# Altium PCB Printer-Pi-Pro_Altium_PCB.pcbdoc
Units mil, origin at the board's own origin, x right, y up, seen from the top; angles counter-clockwise.
Board outline 3337.5 x 1820 mil, 2 copper layers (Top Layer, Bottom Layer); 14 components, 16 nets, 72 pads, 12 vias.
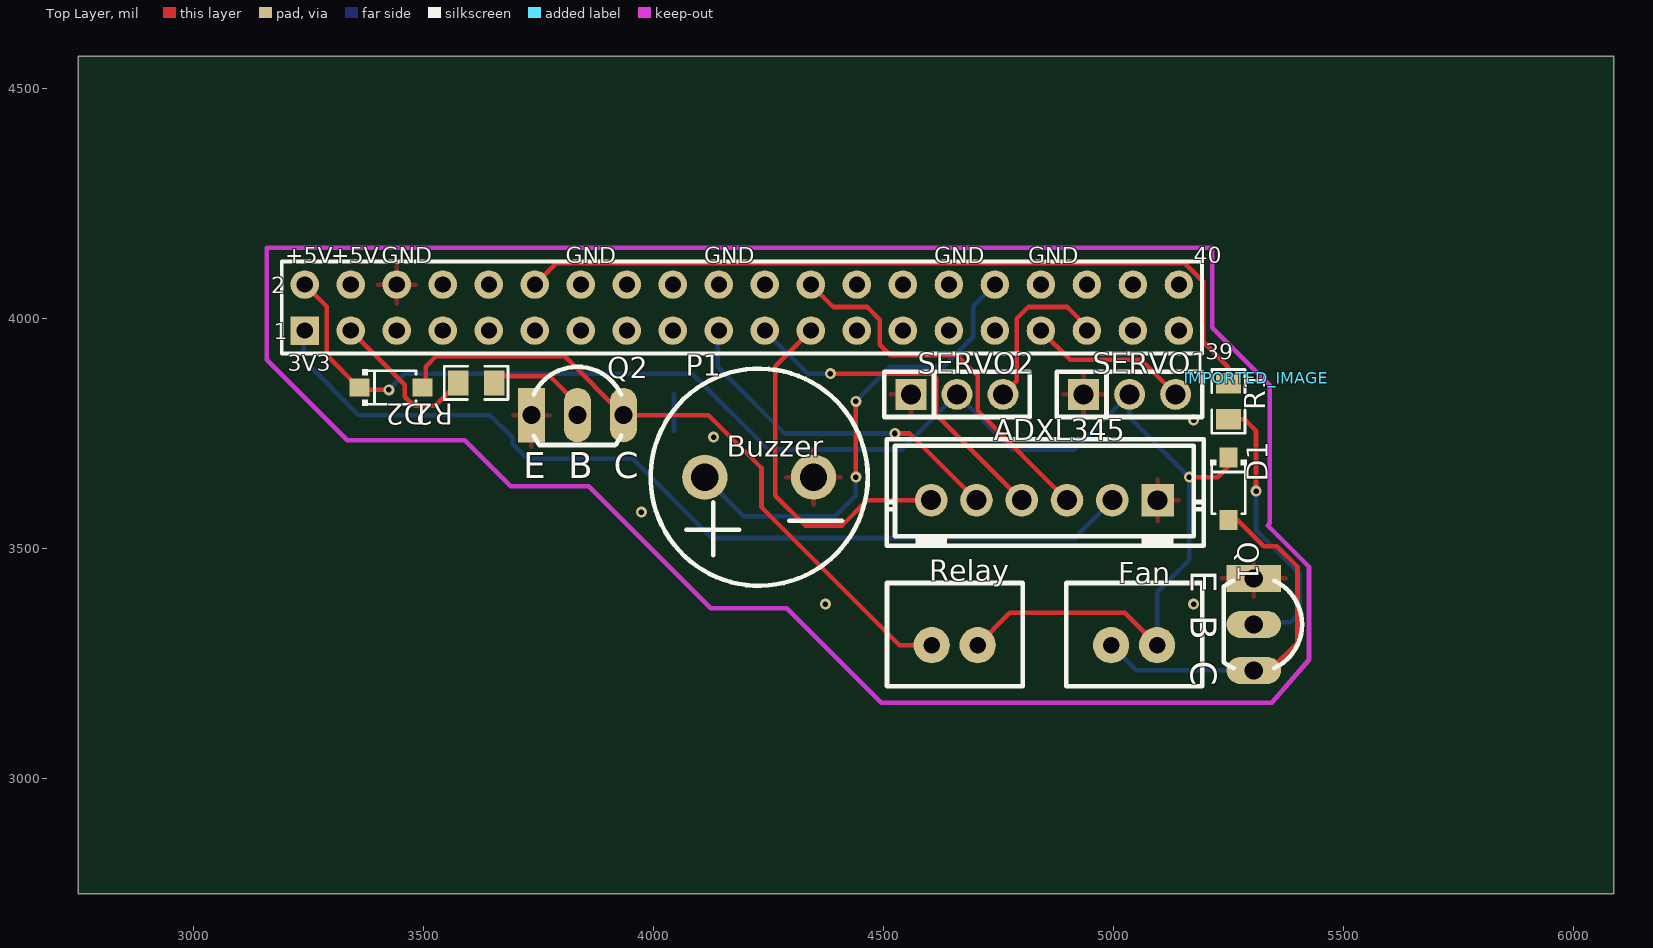
[diagram p0: Top Layer view]
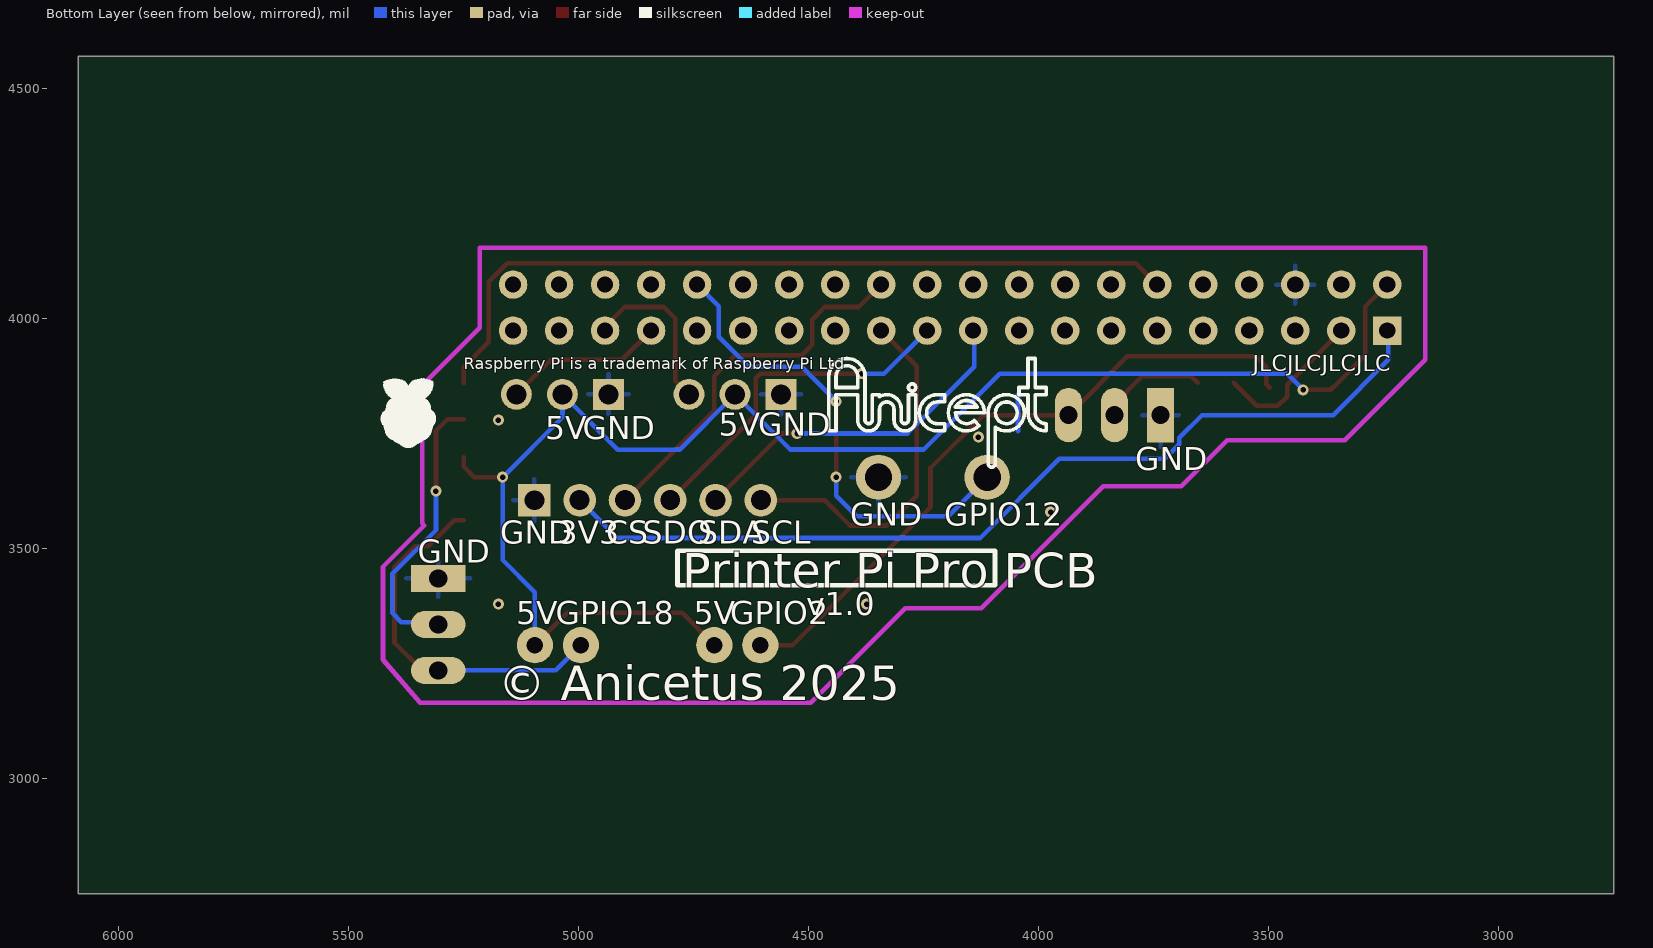
[diagram p1: Bottom Layer view, seen from below]

## Layer stack, top to bottom
Top Layer: signal copper (thickness not stored)
Dielectric: dielectric 12.6, FR-4, Dk 4.8
Bottom Layer: signal copper (thickness not stored)

## Board outline
6087.5,2750 2750,2750 2750,4570 6087.5,4570

## Design rules (kind name [scope] priority, off if disabled: settings)
BoardOutlineClearance copperThickness1oz [All] p0: genericclearance=10 ignorepadtopadclearanceinfootprint=FALSE except(0: Arc-SplitContinuation Track-SplitContinuation SMDPad-SplitContinuation THPad-SplitContinuation Via-SplitContinuation Fill-SplitContinuation Poly-SplitContinuation Region-SplitContinuation Text-SplitContinuation; 6: Track-CutoutEdge SMDPad-CutoutEdge THPad-CutoutEdge Via-CutoutEdge Region-CutoutEdge; 11.8: Track-OutlineEdge SMDPad-OutlineEdge THPad-OutlineEdge Via-OutlineEdge Fill-OutlineEdge Region-OutlineEdge Poly-OutlineEdge Text-OutlineEdge Fill-CutoutEdge)
BoardOutlineClearance copperThickness2oz [All] p0: genericclearance=10 ignorepadtopadclearanceinfootprint=FALSE except(0: Arc-SplitContinuation Track-SplitContinuation SMDPad-SplitContinuation THPad-SplitContinuation Via-SplitContinuation Fill-SplitContinuation Poly-SplitContinuation Region-SplitContinuation Text-SplitContinuation; 6: Track-CutoutEdge SMDPad-CutoutEdge THPad-CutoutEdge Via-CutoutEdge Region-CutoutEdge; 11.8: Track-OutlineEdge SMDPad-OutlineEdge THPad-OutlineEdge Via-OutlineEdge Fill-OutlineEdge Region-OutlineEdge Poly-OutlineEdge Text-OutlineEdge Fill-CutoutEdge)
Clearance copperThickness1oz [(InNet('GND') OR InNet('3V3') OR InNet('$1N1246') OR InNet('$1N1254') OR InNet('$1N1262') OR InNet('$1N1269') OR InNet('BUZZER') OR InNet('$1N1476') OR InNet('+5V') OR InNet('$1N1482') OR InNet('$1N673') OR InNet('$1N1043') OR InNet('RELAY_GPIO') OR InNet('FAN_PWM') OR InNet('$1N779') OR InNet('$1N1048'))] p1: gap=7 ignorepadtopadclearanceinfootprint=FALSE except(4: Track-Track; 6: Track-SMDPad SMDPad-SMDPad Track-THPad SMDPad-THPad THPad-THPad Track-Via SMDPad-Via THPad-Via Via-Via SMDPad-Fill THPad-Fill Via-Fill Fill-Fill Track-Region SMDPad-Region THPad-Region Via-Region Region-Region Track-Poly SMDPad-Poly THPad-Poly Via-Poly Fill-Poly Region-Poly Poly-Poly Track-Text SMDPad-Text THPad-Text Via-Text Fill-Text Region-Text Poly-Text Text-Text; 6.9: Track-Hole SMDPad-Hole THPad-Hole Via-Hole Fill-Hole Region-Hole Poly-Hole Text-Hole Sheet-Hole; 11.8: Track-Fill Fill-Region Track-Sheet SMDPad-Sheet THPad-Sheet Via-Sheet Fill-Sheet Region-Sheet Poly-Sheet Text-Sheet)
Clearance copperThickness2oz [All] p1: gap=7 ignorepadtopadclearanceinfootprint=FALSE except(6: Track-SMDPad SMDPad-SMDPad Track-THPad SMDPad-THPad THPad-THPad Track-Via SMDPad-Via THPad-Via Via-Via SMDPad-Fill THPad-Fill Via-Fill Fill-Fill Track-Region SMDPad-Region THPad-Region Via-Region Region-Region Track-Poly SMDPad-Poly THPad-Poly Via-Poly Fill-Poly Region-Poly Poly-Poly Track-Text SMDPad-Text THPad-Text Via-Text Fill-Text Region-Text Poly-Text Text-Text; 6.9: Track-Hole SMDPad-Hole THPad-Hole Via-Hole Fill-Hole Region-Hole Poly-Hole Text-Hole Sheet-Hole; 8: Track-Track; 11.8: Track-Fill Fill-Region Track-Sheet SMDPad-Sheet THPad-Sheet Via-Sheet Fill-Sheet Region-Sheet Poly-Sheet Text-Sheet)
DiffPairsRouting differentialPair [All] p1: maxuncoupledlength=10 minlimit=6 maxlimit=6 mostfreqgap=6 toplayer_minwidth=5 toplayer_prefwidth=10 toplayer_maxwidth=100 bottomlayer_minwidth=5 bottomlayer_prefwidth=10 bottomlayer_maxwidth=100
PasteMaskExpansion pasteMaskExpansion [All] p1: expansion=0
PlaneConnect innerPlane [All] p1: planeconnectstyle=Relief reliefexpansion=20 reliefentries=4 reliefconductorwidth=10 reliefairgap=10
PolygonConnect copperRegion [All] p1: connectstyle=Relief reliefentries=4 reliefconductorwidth=10 polygonreliefangle="90 Angle" airgapwidth=10
RoutingVias viaSize [All] p1: viastyle="Through Hole" holewidth=12.0078 minholewidth=11.811 maxholewidth=248.0314 width=24.0158 minwidth=19.685 maxwidth=393.7008
SolderMaskExpansion solderMaskExpansion [All] p1: useseparateexpansions=TRUE expansion=2 expansionbottom=2
Width copperThickness1oz [All] p1: maxlimit=100 minlimit=5 preferedwidth=10
Width copperThickness2oz [All] p1: maxlimit=100 minlimit=8 preferedwidth=10

## Components (designator, comment, footprint, x,y, rotation, side; value= is the part's Value field where it differs from the comment)
ADXL345 "B6B-XH-A-GU" CONN-TH_6P-P2.50_C9900020524 4850,3605 r0 top
Buzzer "YS-MBZ12085C05R42" BUZ-TH_BD12.0-P6.00-D0.9-RD 4230,3655 r180 top
D1 "1N4148W_C81598" SOD-123F_L2.7-W1.6-LS3.8-RD 5250,3630 r270 top
D2 "1N4148W_C81598" SOD-123F_L2.7-W1.6-LS3.8-RD 3430,3850 r0 top
Fan "B2B-XH-A(LF)(SN)" "JST-XH 2p" 4995,3290 r0 top
IMPORTED_IMAGE "IMPORTED_IMAGE" IMPORTED_IMAGE 5310,3870 r0 top
P1 "2.54-2*20" HDR-20X2/2.54 4142.39,4073.71 r0 top
Q1 "2N2222A_C5330385" 2N2222A 5305,3335 r270 top
Q2 "2N2222A_C5330385" 2N2222A 3835,3790 r0 top
R1 "ARG05FTC5000" R0805 5250,3820 r90 top
R2 "ARG05FTC5000" R0805 3615,3860 r180 top
Relay "B2B-XH-A(LF)(SN)" "JST-XH 2p" 4605,3290 r0 top
SERVO1 "PZ254V-11-03P" HDR-TH_203S-Y-1X03PG 5035,3835 r0 top
SERVO2 "PZ254V-11-03P" HDR-TH_203S-Y-1X03PG 4660,3835 r0 top

## Footprints (in the part's own frame and the unit in brackets; to place one, negate y for a bottom-side part, rotate by r counter-clockwise, add the part's x,y. Pads: shape width x height; smd on the part's side, far side on the other; paste and mask are expansions set on the pad)
2N2222A [mm]
  rect 1.5x3 hole 1: 1(-2.54,0)
  oval 1.5x3 hole 1: 2(0,0.001) 3(2.54,0.001)
  silkscreen extent -2.41,-1.65 2.42,2.67
BUZ-TH_BD12.0-P6.00-D0.9-RD [mm]
  round 2.5 hole 1.5: 1(-3,0) 2(3,0)
  silkscreen extent -5.99,-5.99 5.99,5.99
CONN-TH_6P-P2.50_C9900020524 [mm]
  rect 1.8x1.8 hole 1.1: 1(6.251,-0.001)
  round 1.8 hole 1.1: 2(3.749,0.001) 3(1.249,0.001) 4(-1.251,0.001) 5(-3.751,0.001) 6(-6.251,0.001)
  silkscreen extent -8.7,-2.52 8.79,3.37
HDR-20X2/2.54 [mil]
  rect 62x62 hole 35: 1(-900,-100)
  round 62 hole 35: 2(-900,0) 3(-800,-100) 4(-800,0) 5(-700,-100) 6(-700,0) 7(-600,-100) 8(-600,0) 9(-500,-100) 10(-500,0) 11(-400,-100) 12(-400,0) 13(-300,-100) 14(-300,0) 15(-200,-100) 16(-200,0) 17(-100,-100) 18(-100,0) 19(0,-100) 20(0,0) 21(100,-100) 22(100,0) 23(200,-100) 24(200,0) 25(300,-100) 26(300,0) 27(400,-100) 28(400,0) 29(500,-100) 30(500,0) 31(600,-100) 32(600,0) 33(700,-100) 34(700,0) 35(800,-100) 36(800,0) 37(900,-100) 38(900,0) 39(1000,-100) 40(1000,0)
  silkscreen extent -950,-150 1050,50
HDR-TH_203S-Y-1X03PG [mm]
  rect 1.7x1.7 hole 1.1: 1(-2.54,0)
  round 1.7 hole 1.1: 2(0,0) 3(2.54,0)
  silkscreen extent -4.01,-1.25 4.01,1.25
IMPORTED_IMAGE [mil]
"JST-XH 2p" [mm]
  round 2 hole 0.914: 1(0,0) 2(2.54,0)
  silkscreen extent -2.47,-2.27 5.03,3.43
R0805 [mm]
  rect 1.133x1.377 smd: 1(-1,0) 2(1,0)
  silkscreen extent -1.76,-0.92 1.76,0.92
SOD-123F_L2.7-W1.6-LS3.8-RD [mm]
  rect 1.1x1 smd: 1(-1.735,0) 2(1.735,0)
  silkscreen extent -1.6,-1 1.38,1

## Via types
v1: diameter 24.02, hole 12.01, Top Layer to Bottom Layer, 12 vias

## Nets (pads, with @x,y where several pads share a name; then routed paths per layer and width w, separated by ;. In a path a pad name is that pad's centre, name@x,y a point inside that pad or via, vN(x,y) a via of type N, cw(c..) or ccw(c..) an arc to the next point about the centre after c; other vN are vias at no path point)
3V3: ADXL345.2 P1.1 | length 2026.3
  Bottom Layer w10: P1.1 3240,3971.32 3240,3910 3360,3790 3645,3790 3694.49,3740.51 3694.49,3726.39 3725.87,3695 3955,3695 4127.07,3522.93 4917.93,3522.93 4925,3530 4925,3532.44 ADXL345.2
$1N673: D1.2 Fan.1 Q1.3 | length 809.8
  Top Layer w10: D1.2 5270,3561.7 5326.69,3505 5355,3505 5400,3460 5400,3295 5340,3235 Q1.3
  Bottom Layer w10: Fan.1 5050,3235 Q1.3
$1N779: Q1.2 R1.1 | length 615.7
  Top Layer w10: R1.1 5285,3780.63 5310,3755.63 v1(5310,3625)
  Bottom Layer w10: Q1.2 5310.02,3340 5385,3340 5405,3360 5405,3445 5310,3540 v1(5310,3625)
$1N1043: D2.2 Q2.3 Relay.1 | length 1466.8
  Top Layer w10: D2.2 3505,3856.7 3505,3895 3527.5,3917.5 3807.52,3917.5 Q2.3 4119.98,3790.02 4235,3675 4235,3590 4535,3290 Relay.1
$1N1048: Q2.2 R2.1 | length 236.7
  Top Layer w10: R2.1 3669.37,3875 3775,3875 3835,3815 Q2.2
$1N1246: ADXL345.3 P1.24 | length 827.5
  Top Layer w10: P1.24 4391.1,4025 4465,4025 4492.5,3997.5 4492.5,3942.5 4515,3920 4660,3920 4705,3875 4705,3799.2 ADXL345.3
$1N1254: ADXL345.4 P1.21 | length 757.5
  Top Layer w10: v1(4385,3880) 4605,3880 4615,3870 4615,3790.77 ADXL345.4
  Bottom Layer w10: P1.21 4336.1,3880 v1(4385,3880)
$1N1262: ADXL345.5 P1.19 | length 762.1
  Top Layer w10: v1(4525,3750) 4557.35,3750 ADXL345.5
  Bottom Layer w10: P1.19 4140,3971.32 4140,3895 4285,3750 v1(4525,3750)
$1N1269: ADXL345.6 P1.23 | length 779.4
  Top Layer w10: P1.23 4265,3896.32 4265,3615 4330,3550 4410,3550 4465.03,3605.03 ADXL345.6
$1N1476: P1.33 SERVO1.3 | length 350.1
  Top Layer w10: P1.33 4906.1,3910 5060,3910 SERVO1.3
$1N1482: P1.35 SERVO2.3 | length 366.6
  Top Layer w10: SERVO2.3 4790,3865 4790,4000 4815,4025 4900,4025 4942.39,3982.61 P1.35
+5V: D1.1 D2.1 Fan.2 P1.2 Relay.2 SERVO1.2 SERVO2.2 | length 3373.5
  Top Layer w10: P1.2 3290,4026.1 3290,3920 D2.1@3360,3850 ; D2.1 D2.1@3360,3850 ; v1(3425,3845) 3365,3845 D2.1@3360,3850 ; Relay.2 4775,3360 5025,3360 Fan.2 ; v1(5165,3655) 5226.69,3655 5250,3678.3 D1.1
  Bottom Layer w10: v1(3425,3845) 3460,3880 4085,3880 4249.8,3715.2 4540.2,3715.2 SERVO2.2 4780,3715 4915,3715 SERVO1.2 5035,3785 v1(5165,3655) 5165,3475 5095,3405 Fan.2
BUZZER: Buzzer.2 P1.32 | length 1033.3
  Top Layer w10: v1(4440,3655) v1(4440,3820)
  Bottom Layer w10: Buzzer.2 4196.89,3570 4395,3570 4440,3615 v1(4440,3655) ; v1(4440,3820) 4515,3895 4630,3895 4695,3960 4695,4026.32 P1.32
FAN_PWM: P1.12 R1.2 | length 1732
  Top Layer w10: P1.12 3788.68,4120 5155,4120 5159.31,4115.69 5159.78,4115.69 5184.37,4091.1 5184.37,4090.63 5195,4080 5195,3949.37 5250,3894.37 R1.2
GND: ADXL345.1 Buzzer.1 P1.6 Q1.1 Q2.1 SERVO1.1 SERVO2.1
  other v1: 4374.1,3379.1 5174.1,3379.1 3974.1,3579.1 4131.05,3742.03 5174.1,3779.1
RELAY_GPIO: P1.3 R2.2 | length 337.1
  Top Layer w10: P1.3 3460,3856.1 3460,3830 3480,3810 3525.63,3810 R2.2
pads on no net: P1.4 P1.5 P1.7 P1.8 P1.9 P1.10 P1.11 P1.13 P1.14 P1.15 P1.16 P1.17 P1.18 P1.20 P1.22 P1.25 P1.26 P1.27 P1.28 P1.29 P1.30 P1.31 P1.34 P1.36 P1.37 P1.38 P1.39 P1.40
copper on no net: | length 80
  Bottom Layer w10: 4045,3755 4045,3835

## Polygon pours and split planes (outlines as drawn)
GND on Top Layer (solid, remove dead copper, pour order 0): 3000,4320 5620,4320 5620,3000 3000,3000
GND on Bottom Layer (solid, remove dead copper, pour order 2): 3065,4240 5505,4240 5505,3090 3065,3090

## Keep-outs
Board Outline Layer:
  lines w10: 3160,3910 3335,3735 3590,3735 3690,3635 3860,3635 4125,3370 4290,3370 4495,3165 5344.69,3165 5425,3258.09 5425,3460 5335,3550 5340,3555 5340,3855 5215,3980 5215,4153.44 3160,4153.44 3160,3910

## Silkscreen, mask and mechanical layers (free items; w line width, h text height)
Top Silkscreen Layer:
  text "+5V" at 3200,4120 h35
  text "+5V" at 3300,4120 h35
  text "GND" at 3410,4120 h35
  text "GND" at 3809.54,4120 h35
  text "GND" at 4111.1,4120 h35
  text "GND" at 4610.84,4120 h35
  text "GND" at 4814.47,4120 h35
  text "40" at 5175,4120 h35
  text "2" at 3170,4055 h35
  text "1" at 3175,3955 h35
  text "39" at 5200,3910 h35
  text "3V3" at 3205,3885 h35
Bottom Silkscreen Layer:
  circle w7.87: c4070.39,3795 r23.62
  circle w7.87: c4275.12,3850 r7.87
  lines w7.87: 3983.78,3755.63 ccw(c3983.78,3795) 4023.15,3795 4023.15,3834.37 4042.83,3834.37 4042.83,3850.12 4023.15,3850.12 4023.15,3913.11 4007.4,3913.11 4007.4,3850.12 3983.78,3850.12 3983.78,3834.37 4007.4,3834.37 4007.4,3795 cw(c3983.78,3795) 3983.78,3771.38 3983.78,3764.5 3983.78,3755.63 ; 4094.02,3684.76 ccw(c4101.89,3684.76) 4109.76,3684.76 4109.76,3795 ccw(c4070.39,3795) 4094.02,3763.5 4094.02,3684.76 ; 4117.64,3795 cw(c4157.01,3795) 4196.38,3795.02 cw(c4157.01,3795) 4129.18,3767.15 4140.31,3778.29 ccw(c4157.01,3795) 4180.63,3795.01 4117.64,3795 ; 4133.39,3807.6 4180.62,3807.61 ccw(c4157.01,3795) 4133.39,3807.6 ; 4204.25,3755.63 4204.25,3763.5 4204.25,3771.38 4220,3771.38 ccw(c4220,3795) 4220,3818.62 4204.25,3818.62 4204.25,3826.5 4204.25,3834.37 4220,3834.37 cw(c4220,3795) 4220,3755.63 4204.25,3755.63 ; 4267.24,3779.25 ccw(c4290.87,3779.25) 4314.49,3779.25 4314.49,3802.87 cw(c4330.24,3802.87) 4330.24,3818.62 cw(c4330.24,3802.87) 4345.98,3802.87 4345.98,3779.25 ccw(c4369.61,3779.25) 4393.23,3779.25 4393.23,3834.37 4440.47,3834.37 4440.47,3755.63 4456.22,3755.63 4456.22,3873.74 ccw(c4416.85,3873.74) 4416.85,3913.11 ccw(c4416.85,3873.74) 4377.48,3873.74 4377.48,3779.25 cw(c4369.61,3779.25) 4361.73,3779.25 4361.73,3834.37 4345.98,3834.37 4345.98,3830.15 ccw(c4330.24,3802.87) 4330.24,3834.37 ccw(c4330.24,3802.87) 4298.74,3802.87 4298.74,3779.25 cw(c4290.87,3779.25) 4282.99,3779.25 4282.99,3834.37 4267.24,3834.37 4267.24,3779.25 ; 4393.23,3850.12 4440.47,3850.12 4440.47,3873.74 ccw(c4416.85,3873.74) 4416.85,3897.36 ccw(c4416.85,3873.74) 4393.23,3873.74 4393.23,3850.12
  lines w10: 4095,3420 4785,3420 4785,3495 4095,3495 4095,3420
  text "Raspberry Pi is a trademark of Raspberry Pi Ltd" at 5250,3890 h25
  text "JLCJLCJLCJLC" at 3535,3885 h35
  text "GND" at 4610,3745 h50
  text "5V" at 4695,3745 h50
  text "GND" at 4990.65,3737.68 h50
  text "5V" at 5072.14,3737.68 h50
  text "GND" at 3790,3670 h50
  text "GPIO12" at 4205,3550 h50
  text "GND" at 4410,3550 h50
  text "SCL" at 4625,3510 h50
  text "SDA" at 4740,3510 h50
  text "SDO" at 4860,3510 h50
  text "CS" at 4940,3510 h50
  text "3V3" at 5045,3510 h50
  text "GND" at 5170,3510 h50
  text "GND" at 5349.74,3468.61 h50
  text "Printer Pi Pro PCB" at 4775,3415 h75
  text "v1.0" at 4505,3355 h50
  text "GPIO2" at 4670,3335 h50
  text "5V" at 4750,3335 h50
  text "GPIO18" at 5050,3335 h50
  text "5V" at 5135,3335 h50
  text "© Anicetus 2025" at 5175,3170 h75

## Text inside footprints (layer, text, board x,y; h text height)
Q1: Top Silkscreen Layer "E" at 5168.11,3452.94 h57.17 r270; Top Silkscreen Layer "B" at 5168.11,3354.44 h57.17 r270; Top Silkscreen Layer "C" at 5168.11,3255.94 h57.17 r270
Q2: Top Silkscreen Layer "E" at 3717.06,3653.11 h57.17; Top Silkscreen Layer "B" at 3815.56,3653.11 h57.17; Top Silkscreen Layer "C" at 3914.06,3653.11 h57.17